# Altium PCB PCB1.PcbDoc
Units mm, origin at the board's own origin, x right, y up, seen from the top; angles counter-clockwise.
Board outline 38 x 38.6 mm, 4 copper layers (Top Layer, Internal Plane 1, Internal Plane 2, Bottom Layer); 24 components, 31 nets, 133 pads, 22 vias.
Unrouted connection lines stored in the file: 1.
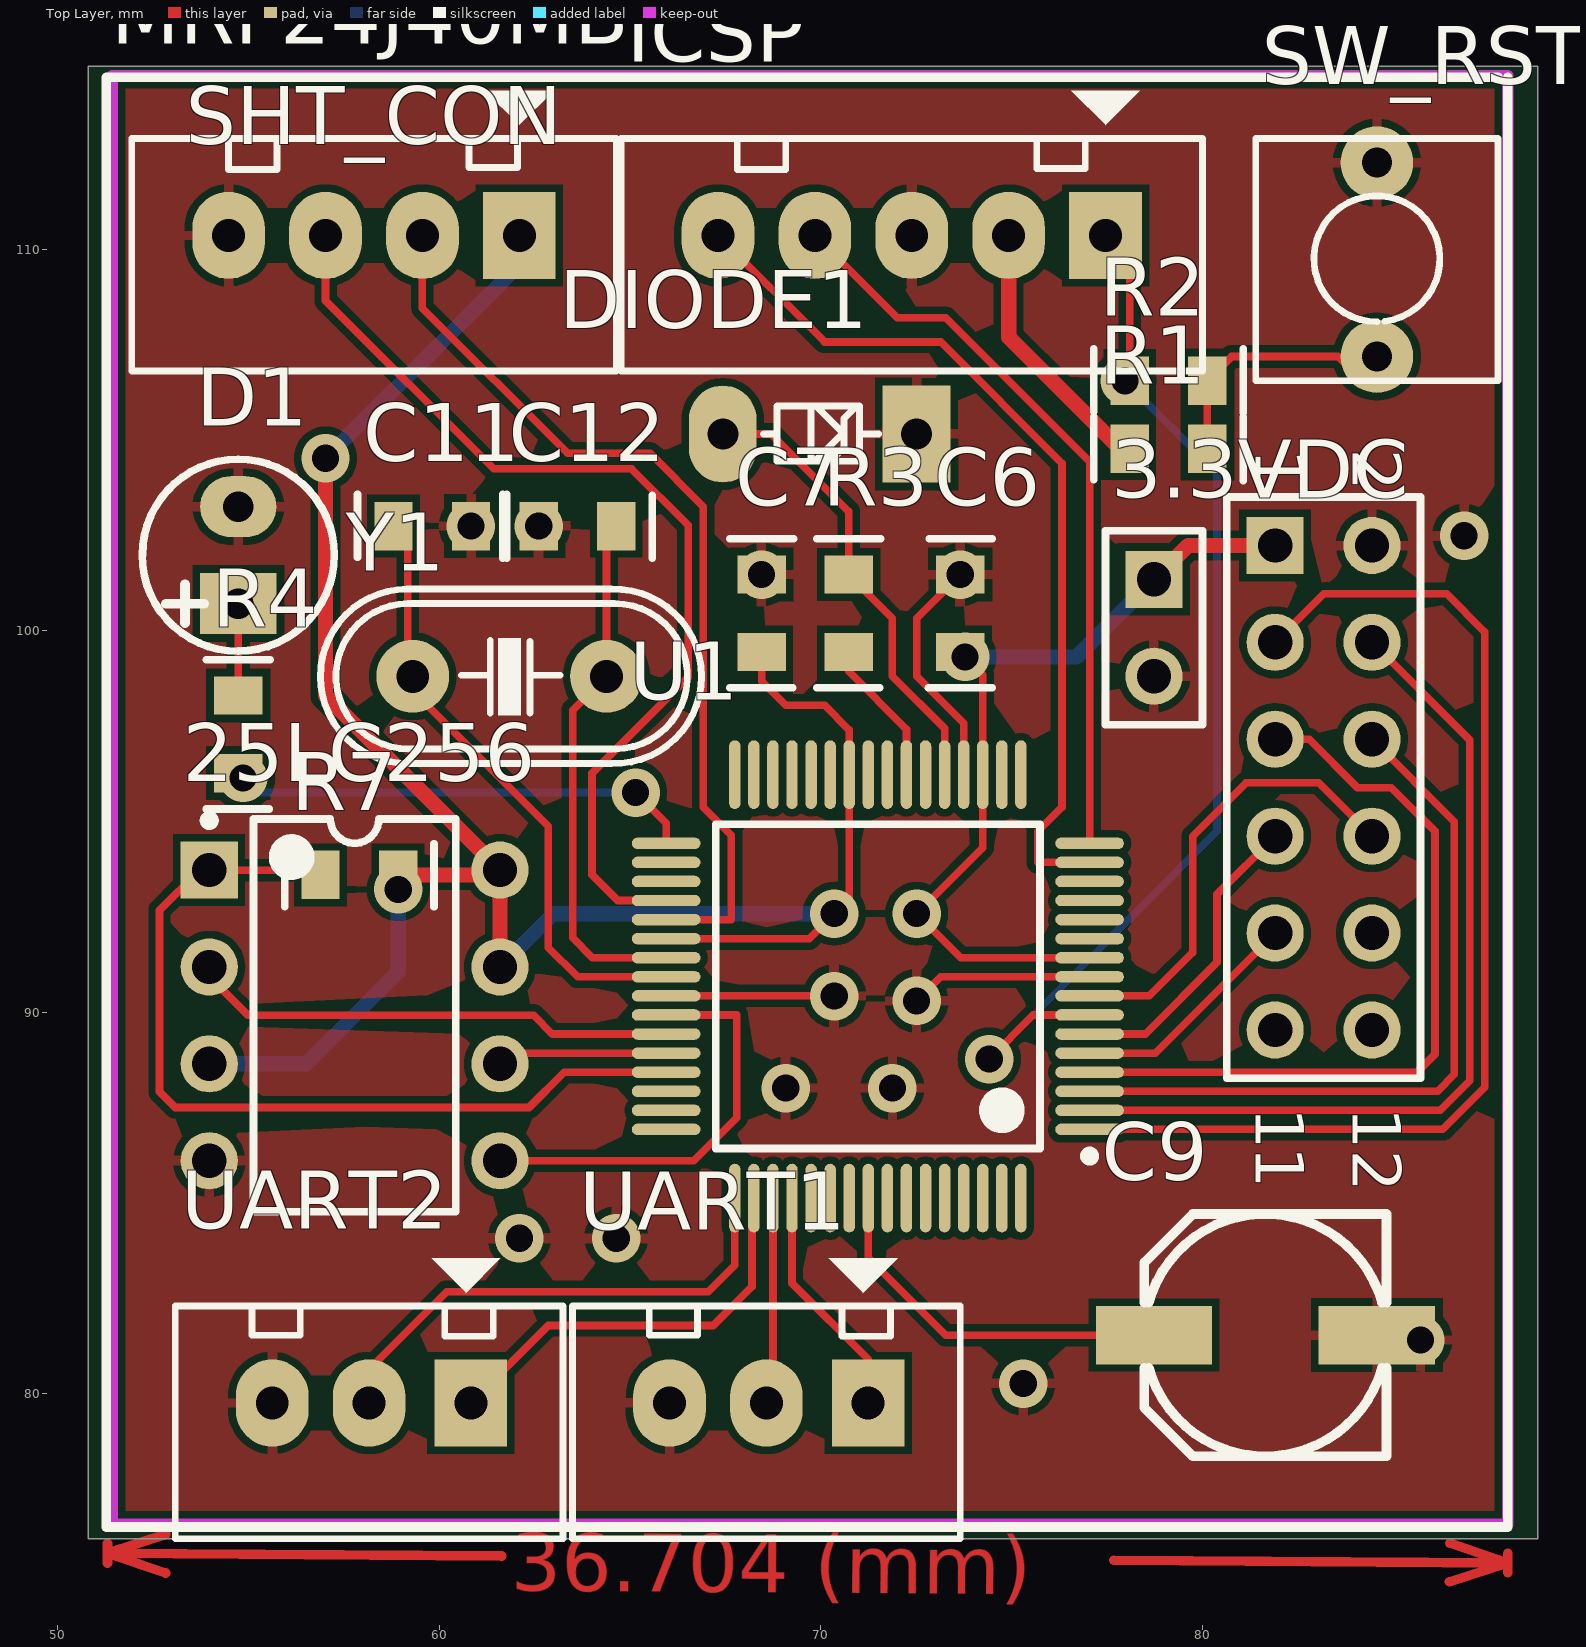
[diagram p0: Top Layer view]
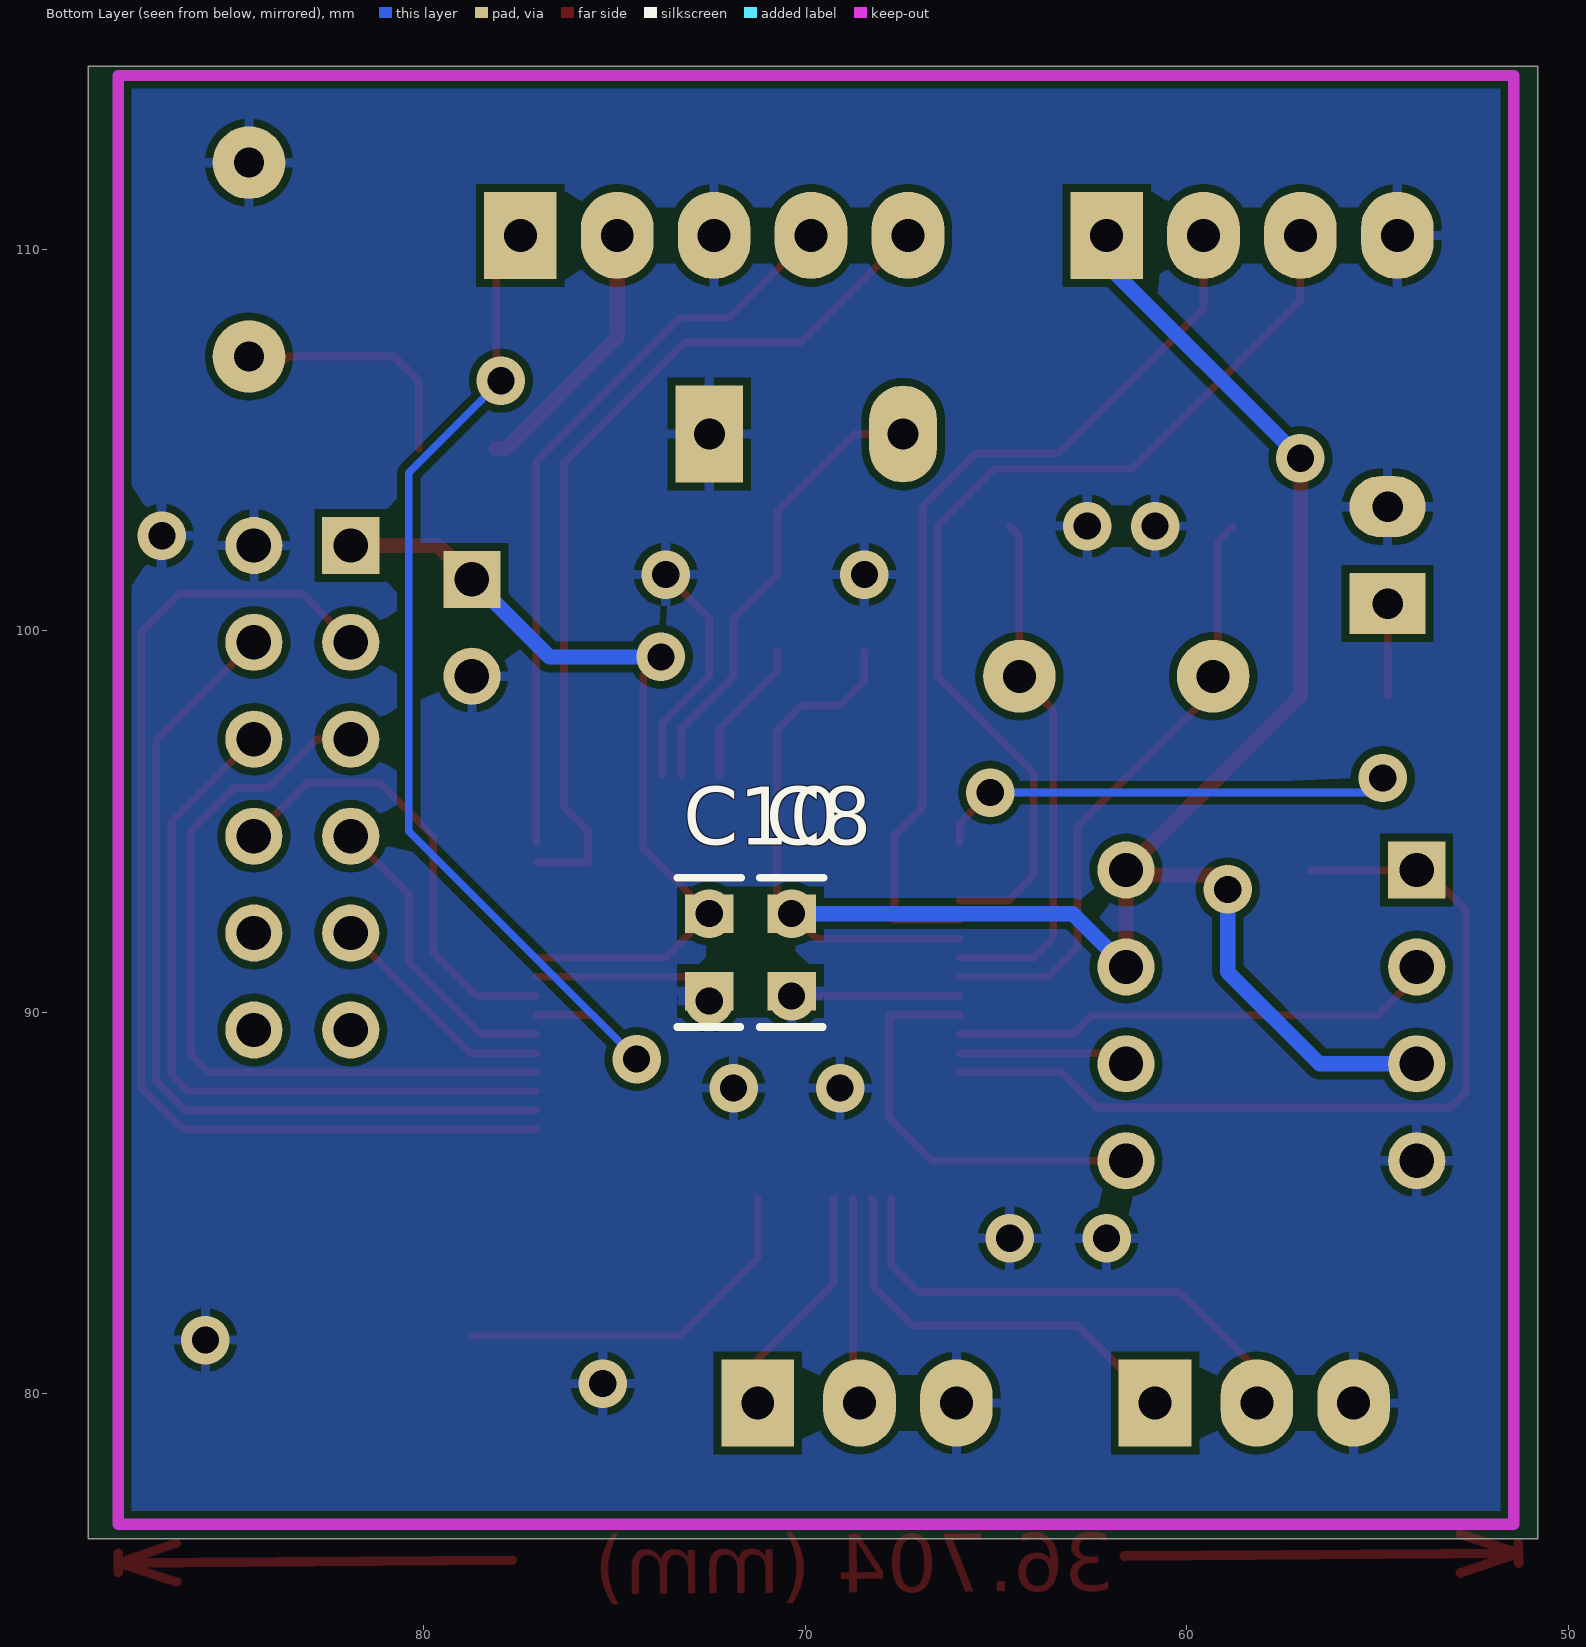
[diagram p1: Bottom Layer view, seen from below]
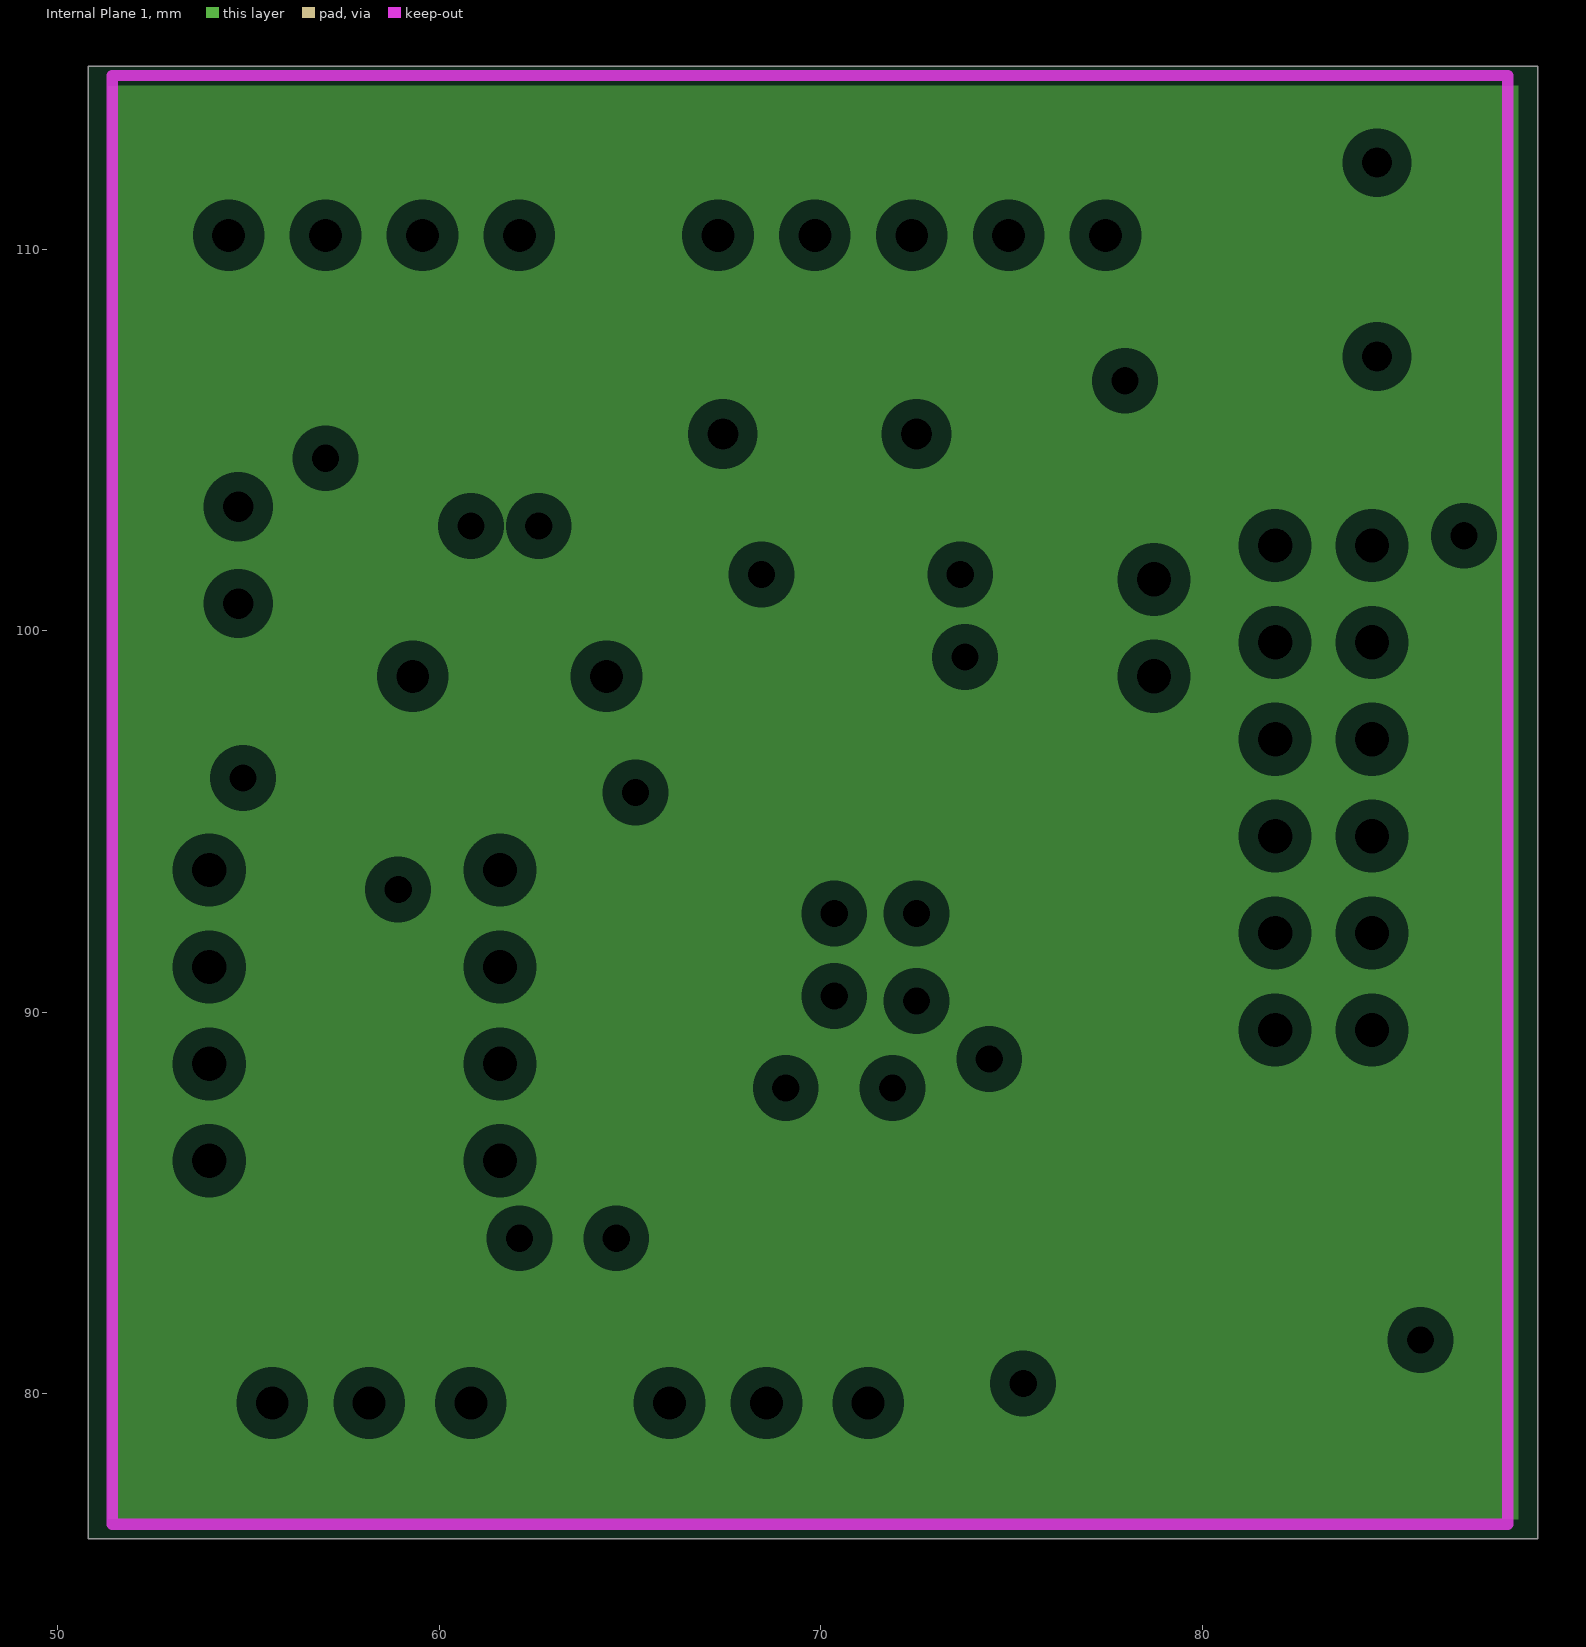
[diagram p2: Internal Plane 1, clearances drawn from the general rule]
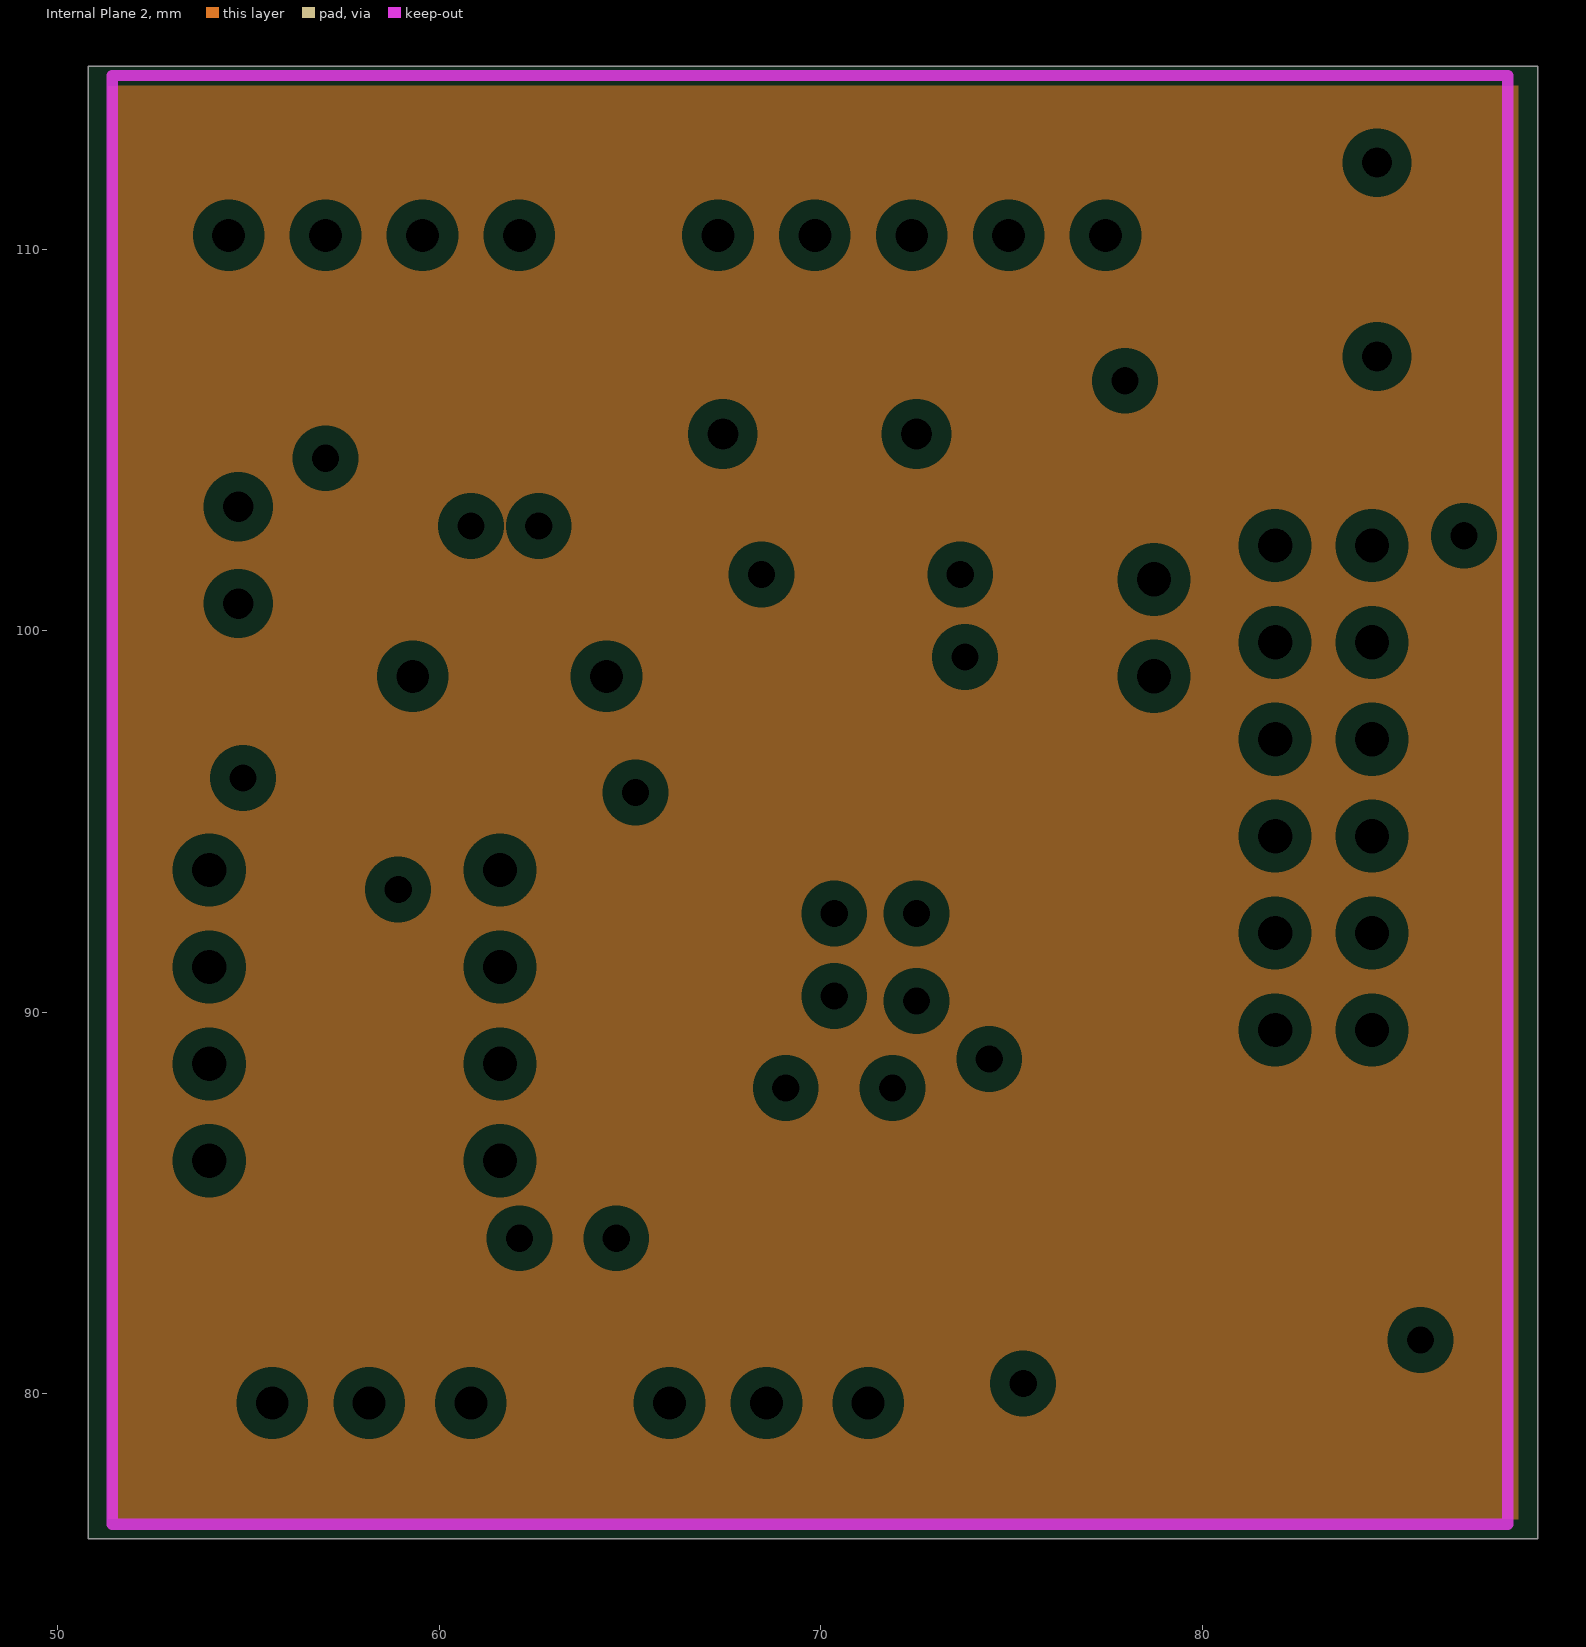
[diagram p3: Internal Plane 2, clearances drawn from the general rule]
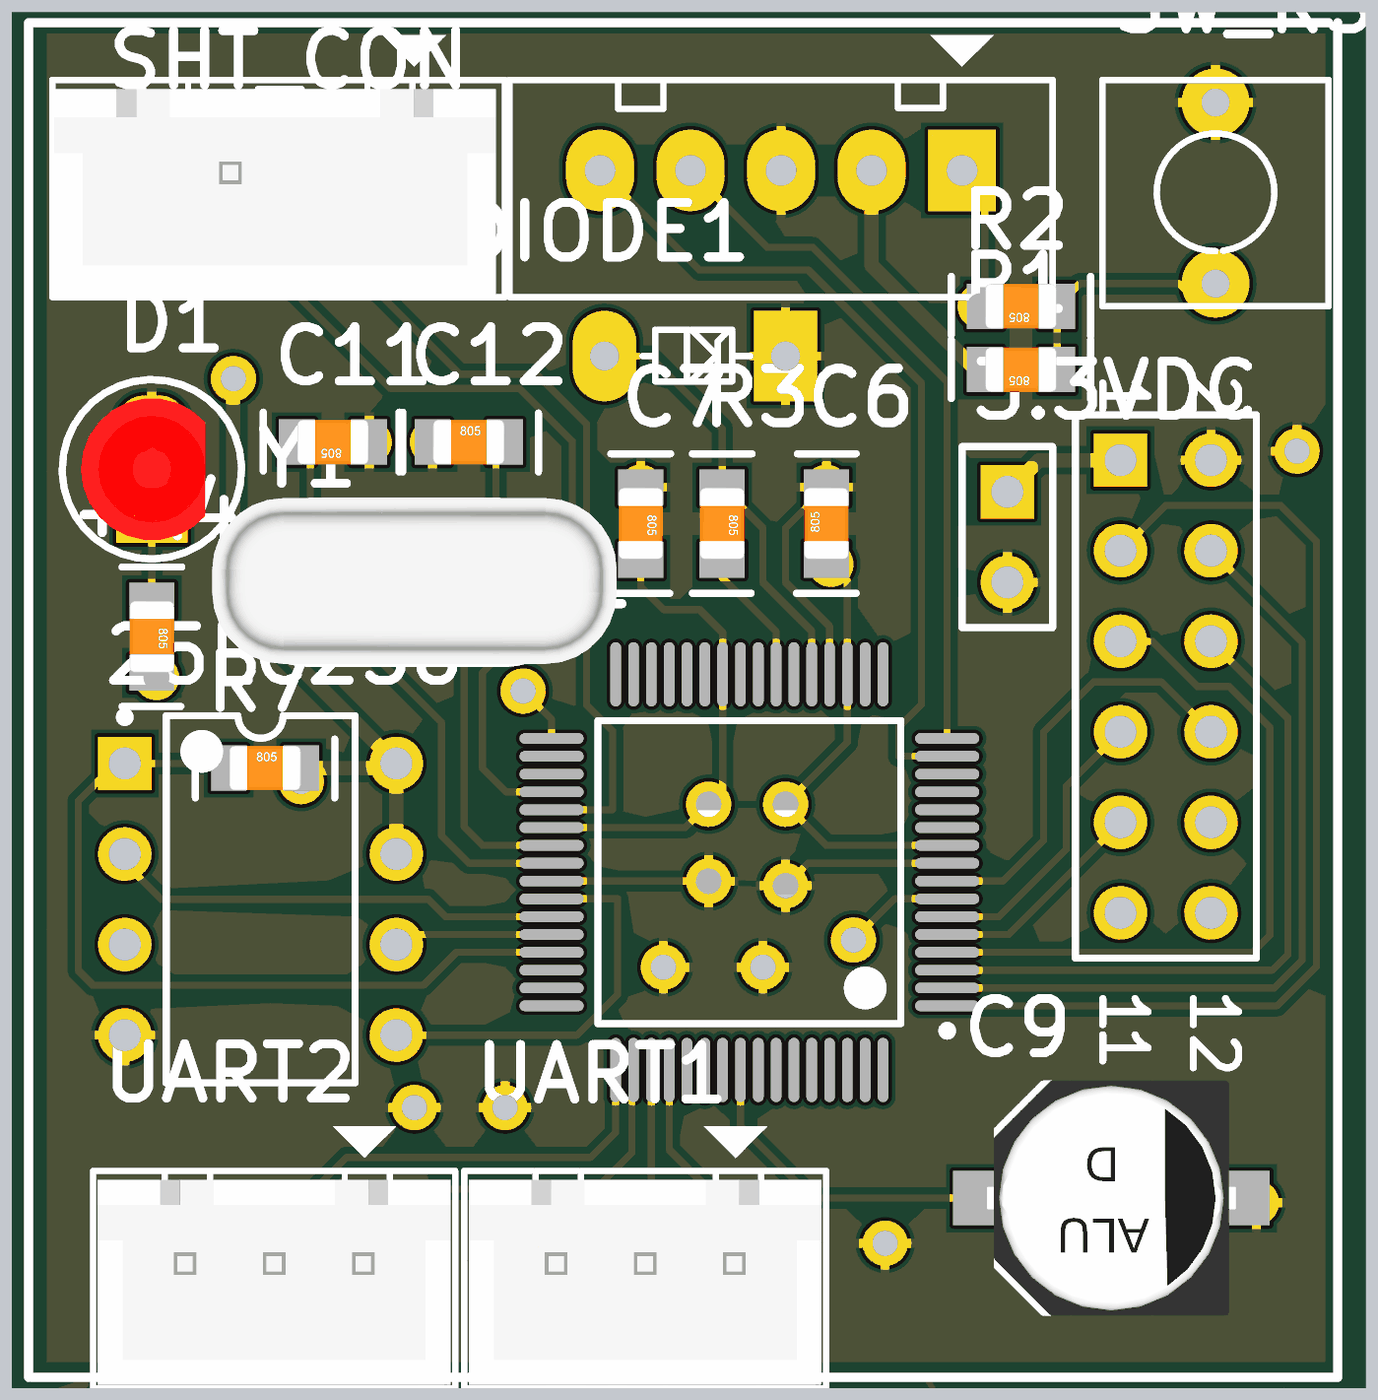
[diagram p4: 3D render of the assembled board from above, using the file's embedded part models]

## Layer stack, top to bottom
Top Solder: solder mask 0.0102, Solder Resist, Dk 3.5
Top Layer: signal copper 0.0356
Dielectric1: dielectric 0.32, FR-4, Dk 4.8
Internal Plane 1: plane copper 0.0356
Dielectric2: dielectric 0.32, FR-4, Dk 4.8
Internal Plane 2: plane copper 0.0356
Dielectric3: dielectric 0.32, FR-4, Dk 4.8
Bottom Layer: signal copper 0.0356
Bottom Solder: solder mask 0.0102, Solder Resist, Dk 3.5

## Board outline
50.8,76.2 88.8,76.2 88.8,114.8 50.8,114.8

## Design rules (kind name [scope] priority, off if disabled: settings)
Clearance [All] p1: gap=0.2
PlaneClearance [All] p1: clearance=0.508
PlaneConnect [All] p1: planeconnectstyle=Relief reliefexpansion=0.508 reliefentries=4 reliefconductorwidth=0.254 reliefairgap=0.254
PolygonConnect [All] p1: connectstyle=Relief reliefconductorwidth=0.254 reliefentries=4 polygonreliefangle="90 Angle" airgapwidth=0.254
RoutingVias [All] p1: holewidth=0.6 width=1 viastyle="Through Hole" minholewidth=0.711 minwidth=1.27 maxholewidth=0.711 maxwidth=1.27
SilkToSolderMaskClearance SilkscreenOverComponentPads [IsPad] p1: minsilkscreentomaskgap=0.254 clearancetoexposedcopper=TRUE
SolderMaskExpansion [All] p1: expansion=0.102
UnpouredPolygon [All] p1: allowunpoured=FALSE
Width [All] p1: maxlimit=0.2 minlimit=0.2 preferedwidth=0.2
26 further rules are at their usual default settings.

## Components (designator, comment, footprint, x,y, rotation, side; value= is the part's Value field where it differs from the comment)
3.3VDC "OUT 3.3V" HDR1X2 78.74,101.346 r270 top
25LC256 "25LC256" DIP-8 57.785,89.916 r0 top
C6 "Cap" C0805 73.66,100.457 r90 top
C7 "Cap" C0805 68.453,100.457 r270 top
C8 "Cap" C0805 70.358,91.567 r270 bottom
C9 "Cap2" "CAP P 6.3x5.4" 81.661,81.534 r180 top
C10 "Cap" C0805 72.517,91.567 r270 bottom
C11 "Cap" C0805 59.817,102.743 r180 top
C12 "Cap" C0805 63.627,102.743 r0 top
D1 "LED nguon" LED3mm 54.737,101.981 r90 top
DIODE1 "Diode" DZ0.5A 67.437,105.156 r180 top
ICSP "ICSP" CON5 77.47,110.363 r180 top
MRF24J40MB "Header 6X2" MRF24J40MB_board_mini 85.725,103.505 r180 top locked
R1 "Res1" C0805 79.121,104.775 r180 top
R2 "res" C0805 79.121,106.553 r180 top
R3 "Res1" C0805 70.739,100.457 r270 top
R4 "Res1" C0805 54.737,97.282 r270 top
R7 "Res Semi" C0805 57.912,93.599 r0 top
SHT_CON "SHT10 conector" CON4 62.103,110.363 r180 top
SW_RST "SW" SW2 84.582,112.268 r270 top
U1 "PIC24FJ128GA306" TQFP-PT64_N 71.501,90.678 r180 top
UART1 "UART1" CON3 71.12,79.756 r180 top
UART2 "UART2" CON3 60.706,79.756 r180 top
Y1 "XTAL" XT2 61.849,98.806 r180 top

## Footprints (in the part's own frame and the unit in brackets; to place one, negate y for a bottom-side part, rotate by r counter-clockwise, add the part's x,y. Pads: shape width x height; smd on the part's side, far side on the other; paste and mask are expansions set on the pad)
C0805 [mm] "Chip Resistor; Body 2.0 x 1.3 mm (LxW typ)"
  rect 1x1.27 smd: 1(-1.016,0) 2(1.016,0)
  silkscreen extent -1.96,-0.84 1.96,0.84, body extent -1,-0.62 1,0.63, height 0.78
"CAP P 6.3x5.4" [mil]
  rect 120x60 smd: 1(115,0) 2(-115,0)
  silkscreen extent -125,-125 125,125, body extent -138,-130 138,130, height 213
CON3 [mil] "CON 3"
  rect 75x90 hole 34: 1(-5,0)
  oval 75x90 hole 34: 2(100,0) 3(200,0)
  silkscreen extent -100,-150 300,140, body extent -95,-90 295,136, height 276
CON4 [mil] "CON4"
  rect 75x90 hole 34: 1(0,0)
  oval 75x90 hole 34: 2(100,0) 3(200,0) 4(300,0)
  silkscreen extent -100,-150 400,140, body extent -90,-90 398,136, height 276
CON5 [mil] "CON5"
  rect 75x90 hole 34: 1(0,0)
  oval 75x90 hole 34: 2(100,0) 3(200,0) 4(300,0) 5(400,0)
  silkscreen extent -100,-150 500,140
DIP-8 [mm] "DIP; 8 Leads; Row Spacing 7.62 mm; Pitch 2.54 mm"
  rect 1.5x1.5 hole 0.9: 1(-3.81,3.81)
  round 1.5 hole 0.9: 2(-3.81,1.27) 3(-3.81,-1.27) 4(-3.81,-3.81) 5(3.81,-3.81) 6(3.81,-1.27) 7(3.81,1.27) 8(3.81,3.81)
  silkscreen extent -3.93,-5.15 2.65,5.23, body extent -3.6,-5.15 3.6,5.15, height 5.08
DZ0.5A [mil] "Diode Zenner, W 80mil, L 300mil"
  oval 70x100 hole 32: 1(0,0)
  rect 70x100 hole 32: 2(-200,0)
  silkscreen extent -161,-29 -42,28
HDR1X2 [mm] "Connector; Header; 2 Position"
  rect 1.5x1.5 hole 0.9: 1(0,0)
  round 1.5 hole 0.9: 2(2.54,0)
  silkscreen extent -1.27,-1.27 3.81,1.27
LED3mm [mm]
  rect 1.6x2 hole 0.8: 1(-1.27,0)
  oval 1.6x2 hole 0.8: 2(1.27,0)
  silkscreen extent -2.52,-2.51 2.51,2.52, body extent -1.99,-1.5 1.99,1.99, height 5.38
MRF24J40MB_board_mini [mm]
  rect 1.5x1.5 hole 0.9: 1(3.81,1.27)
  round 1.5 hole 0.9: 2(1.27,1.27) 3(3.81,3.81) 4(1.27,3.81) 5(3.81,6.35) 6(1.27,6.35) 7(3.81,8.89) 8(1.27,8.89) 9(3.81,11.43) 10(1.27,11.43) 11(3.81,13.97) 12(1.27,13.97)
  silkscreen extent -2.29,-11 34.45,27, body extent 0,0 5.08,15.24, height 7
SW2 [mil] "SW button 2pin, 250x 250 mil"
  round 75 hole 31: 1(0,0) 2(200,0)
  silkscreen extent -25,-125 225,125
TQFP-PT64_N [mm] "Thin QFP, 64-Leads, Body 10x10mm, Pitch 0.5mm, IPC Medium Density"
  oval 1.8x0.3 smd: 1(-5.55,3.75) 2(-5.55,3.25) 3(-5.55,2.75) 4(-5.55,2.25) 5(-5.55,1.75) 6(-5.55,1.25) 7(-5.55,0.75) 8(-5.55,0.25) 9(-5.55,-0.25) 10(-5.55,-0.75) 11(-5.55,-1.25) 12(-5.55,-1.75) 13(-5.55,-2.25) 14(-5.55,-2.75) 15(-5.55,-3.25) 16(-5.55,-3.75) 33(5.55,-3.75) 34(5.55,-3.25) 35(5.55,-2.75) 36(5.55,-2.25) 37(5.55,-1.75) 38(5.55,-1.25) 39(5.55,-0.75) 40(5.55,-0.25) 41(5.55,0.25) 42(5.55,0.75) 43(5.55,1.25) 44(5.55,1.75) 45(5.55,2.25) 46(5.55,2.75) 47(5.55,3.25) 48(5.55,3.75)
  oval 0.3x1.8 smd: 17(-3.75,-5.55) 18(-3.25,-5.55) 19(-2.75,-5.55) 20(-2.25,-5.55) 21(-1.75,-5.55) 22(-1.25,-5.55) 23(-0.75,-5.55) 24(-0.25,-5.55) 25(0.25,-5.55) 26(0.75,-5.55) 27(1.25,-5.55) 28(1.75,-5.55) 29(2.25,-5.55) 30(2.75,-5.55) 31(3.25,-5.55) 32(3.75,-5.55) 49(3.75,5.55) 50(3.25,5.55) 51(2.75,5.55) 52(2.25,5.55) 53(1.75,5.55) 54(1.25,5.55) 55(0.75,5.55) 56(0.25,5.55) 57(-0.25,5.55) 58(-0.75,5.55) 59(-1.25,5.55) 60(-1.75,5.55) 61(-2.25,5.55) 62(-2.75,5.55) 63(-3.25,5.55) 64(-3.75,5.55)
  silkscreen extent -5.68,-4.25 4.25,4.57, body extent -5,-5 5,5, height 1.2
XT2 [mil] "Footpin for Crystal 2 pin"
  round 75 hole 34: 1(-100,0) 2(100,0)
  silkscreen extent -198,-90 195,90, body extent -233,-93 213,90, height 138

## Part data
3.3VDC: library part "Header 2", "Header, 2-Pin"
C6 C7 C8 C9 C10 C11 C12: "Capacitor"
D1: library part LED0, "Typical INFRARED GaAs LED"
DIODE1: "Default Diode"
ICSP: library part "Header 5", "Header, 5-Pin"
MRF24J40MB: "Header, 6-Pin, Dual row"
R1 R3 R4: "Resistor"
R2: library part Res1, "Resistor"
R7: "Semiconductor Resistor"
SHT_CON: library part "Header 4", "Header, 4-Pin"
SW_RST: library part SW2, "Switch button 2 pin"
UART1 UART2: library part Con3, "Connector 3"
Y1: "Crystal Oscillator"

## Via types
v1: diameter 1.27, hole 0.711, Top Layer to Bottom Layer, 22 vias

## Nets (pads, with @x,y where several pads share a name; then routed paths per layer and width w, separated by ;. In a path a pad name is that pad's centre, name@x,y a point inside that pad or via, vN(x,y) a via of type N, cw(c..) or ccw(c..) an arc to the next point about the centre after c; other vN are vias at no path point)
3.3VDC: 3.3VDC.1 25LC256.3 25LC256.7 25LC256.8 C6.1 C7.2 C8.1 C10.1 MRF24J40MB.1 R7.2 SHT_CON.1 U1.10 U1.19 U1.26 U1.38 | length 78.6
  Top Layer w0.2: U1.38 69.703,91.928 v1(70.358,92.583) 70.751,92.976 U1.26 70.751,97.397 70.104,98.044 69.088,98.044 68.453,98.679 C7.2 ; C6.1 v1(73.787,99.314) 74.251,98.85 U1.19 74.251,94.317 v1(72.517,92.583) 73.672,91.428 U1.10
  Top Layer w0.4: v1(57.023,104.521) 57.023,98.298 25LC256.8 25LC256.7 ; R7.2 25LC256.8@61.468,93.599 ; 3.3VDC.1 79.629,102.235 MRF24J40MB.1
  Bottom Layer w0.2: SHT_CON.1@62.103,109.601 SHT_CON.1
  Bottom Layer w0.4: 25LC256.3 56.515,88.646 58.928,91.059 v1(58.928,93.218) ; v1(57.023,104.521) SHT_CON.1@62.103,109.601 ; 25LC256.7 62.992,92.583 v1(70.358,92.583) ; v1(73.787,99.314) 76.708,99.314 3.3VDC.1
AN8: DIODE1.1 R3.1 U1.21 | length 12.1
  Top Layer w0.2: DIODE1.1 68.707,105.156 70.739,103.124 R3.1 71.882,100.33 71.882,98.806 73.251,97.437 U1.21
CS1: MRF24J40MB.6 U1.3 | length 19.4
  Top Layer w0.2: U1.3 86.172,87.928 86.614,88.37 86.614,94.996 MRF24J40MB.6
CS2: 25LC256.1 R7.1 U1.45 | length 22.9
  Top Layer w0.2: 25LC256.1@53.721,93.726 52.671,92.676 52.671,87.918 53.086,87.503 62.357,87.503 63.282,88.428 U1.45 ; 25LC256.1 R7.1@56.769,93.726
GND: 3.3VDC.2 25LC256.4 C6.2 C7.1 C8.2 C9.2 C10.2 C11.1 C12.1 D1.2 DIODE1.2 ICSP.3 MRF24J40MB.2 SHT_CON.4 SW_RST.1 U1.9 U1.20 U1.25 U1.41 UART1.3 UART2.3 | length 15.7
  Top Layer w0.2: U1.41 70.354,90.428 v1(70.358,90.424) ; v1(72.517,90.297) 73.148,90.928 U1.9 ; v1(73.66,101.473) 72.517,100.33 72.517,98.806 73.751,97.572 U1.20
  Bottom Layer w0.2: v1(72.517,90.297) C10.2
  other v1: 75.311,80.264 85.725,81.407 62.103,84.074 64.643,84.074 69.088,88.011 71.882,88.011 68.453,101.473 86.868,102.489 60.833,102.743 62.611,102.743
INT1_RP21: MRF24J40MB.5 U1.4 | length 20.3
  Top Layer w0.2: U1.4 85.634,88.428 86.106,88.9 86.106,94.742 84.963,95.885 84.074,95.885 82.804,97.155 MRF24J40MB.5
LED1: R4.2 U1.33 | length 12.3
  Top Layer w0.2: R4.2 v1(54.864,96.139) ; v1(65.151,95.758) 65.951,94.958 U1.33
  Bottom Layer w0.2: v1(54.864,96.139) 55.245,95.758 v1(65.151,95.758)
NetC9_1: C9.1 U1.56 | length 9.9
  Top Layer w0.2: U1.56 71.251,83.562 73.279,81.534 C9.1
NetD1_1: D1.1 R4.1 | length 2.4
  Top Layer w0.2: R4.1 D1.1
NetR1_1: R1.1 R2.1 SW_RST.2 | length 6.2
  Top Layer w0.2: R1.1 R2.1 80.772,107.188 83.566,107.188 SW_RST.2@84.074,106.68
OSCI: C12.2 U1.39 Y1.1 | length 13.9
  Top Layer w0.2: C12.2 64.389,102.489 Y1.1 63.5,97.917 63.5,91.948 64.02,91.428 U1.39
OSCO: C11.2 U1.40 Y1.2 | length 16.1
  Top Layer w0.2: C11.2 59.182,102.362 59.182,98.933 Y1.2 59.309,98.425 62.865,94.869 62.865,91.694 63.631,90.928 U1.40
PGC: ICSP.5 U1.15 | length 23.6
  Top Layer w0.2: ICSP.5 70.104,107.569 73.152,107.569 76.327,104.394 76.327,95.377 75.692,94.742 75.692,93.928 U1.15
PGD: ICSP.4 U1.16 | length 19.7
  Top Layer w0.2: ICSP.4 72.009,108.204 73.279,108.204 77.051,104.432 U1.16
RB10: R3.2 U1.23 | length 3.8
  Top Layer w0.2: R3.2 70.739,98.933 72.251,97.421 U1.23
RSTMRF: MRF24J40MB.3 U1.1 | length 29.2
  Top Layer w0.2: U1.1 86.303,86.928 87.414,88.039 87.414,99.966 86.415,100.965 83.185,100.965 MRF24J40MB.3
SCK1_RP26: MRF24J40MB.9 U1.5 | length 6.2
  Top Layer w0.2: U1.5 78.768,88.928 MRF24J40MB.9
SCK2_RP3: 25LC256.6 U1.44 | length 4.7
  Top Layer w0.2: 25LC256.6@61.341,88.646 61.623,88.928 U1.44
SCL1: SHT_CON.2 U1.37 | length 24.3
  Top Layer w0.2: SHT_CON.2 59.563,108.458 63.373,104.648 65.532,104.648 66.929,103.251 66.929,95.377 67.663,94.643 67.663,92.428 U1.37
SDA1: SHT_CON.3 U1.36 | length 26.1
  Top Layer w0.2: SHT_CON.3 57.023,108.654 61.429,104.248 65.043,104.248 66.529,102.762 66.529,98.787 64.008,96.266 64.008,93.599 64.679,92.928 U1.36
SDI1_RP27: MRF24J40MB.8 U1.8 | length 12.1
  Top Layer w0.2: U1.8 78.617,90.428 79.756,91.567 79.756,94.615 81.153,96.012 83.058,96.012 MRF24J40MB.8
SDI2_RP4: 25LC256.2 U1.43 | length 13
  Top Layer w0.2: 25LC256.2@53.721,91.186 54.991,89.916 62.484,89.916 62.972,89.428 U1.43
SDO1_RP19: MRF24J40MB.7 U1.6 | length 8.1
  Top Layer w0.2: U1.6 78.506,89.428 80.391,91.313 80.391,93.091 MRF24J40MB.7
SDO2_RP2: 25LC256.5 U1.42 | length 11.5
  Top Layer w0.2: 25LC256.5@61.341,86.106 66.675,86.106 67.806,87.237 67.806,89.928 U1.42
U1RX_RP22: U1.51 UART1.2 | length 5.4
  Top Layer w0.2: UART1.2 68.751,79.927 U1.51
U1TX_RP25: U1.52 UART1.1 | length 6.2
  Top Layer w0.2: U1.52 69.251,82.895 71.247,80.899 UART1.1
U2RX_RP24: U1.49 UART2.2 | length 13.4
  Top Layer w0.2: UART2.2 58.166,80.645 60.198,82.677 67.056,82.677 67.751,83.372 U1.49
U2TX_RP23: U1.50 UART2.1 | length 11
  Top Layer w0.2: UART2.1 62.865,81.788 67.183,81.788 68.201,82.806 68.201,85.078 U1.50
VCC: ICSP.2 R1.2 | length 7.1
  Top Layer w0.4: ICSP.2 74.93,107.696 77.851,104.775 R1.2
VPP: ICSP.1 R2.2 U1.7 | length 28.4
  Top Layer w0.2: v1(74.422,88.773) 75.577,89.928 U1.7 ; ICSP.1 78.105,109.728 R2.2
  Bottom Layer w0.2: v1(74.422,88.773) 80.391,94.742 80.391,104.14 v1(77.978,106.553)
WAKE: MRF24J40MB.4 U1.2 | length 22.8
  Top Layer w0.2: U1.2 86.237,87.428 87.014,88.205 87.014,97.136 MRF24J40MB.4
pads on no net: MRF24J40MB.10 MRF24J40MB.11 MRF24J40MB.12 U1.11 U1.12 U1.13 U1.14 U1.17 U1.18 U1.22 U1.24 U1.27 U1.28 U1.29 U1.30 U1.31 U1.32 U1.34 U1.35 U1.46 U1.47 U1.48 U1.53 U1.54 U1.55 U1.57 U1.58 U1.59 U1.60 U1.61 U1.62 U1.63 U1.64
copper on no net: | length 28.1
  Top Layer w0.254: 51.306,75.565 51.31,76.073 ; 52.828,75.3 51.308,75.819 ; 52.835,76.316 51.308,75.819 ; 61.636,75.748 51.308,75.819 ; 77.683,75.636 88.011,75.565 ; 86.484,75.068 88.011,75.565 ; 86.491,76.084 88.011,75.565 ; 88.009,75.311 88.013,75.819

## Polygon pours and split planes (outlines as drawn)
GND on Bottom Layer "Top Layer-No Net" (solid, pour order 19): 51.435,114.3 51.689,114.554 88.011,114.554 88.011,76.581 87.757,76.835 51.435,76.835
GND on Top Layer "Top Layer-No Net" (solid, pour order 17): 51.435,114.554 87.884,114.554 88.011,114.427 88.011,76.581 51.435,76.581
no net on Internal Plane 1 (split plane): 88.29,76.71 51.31,76.71 51.31,114.29 88.29,114.29
no net on Internal Plane 2 (split plane): 88.29,76.71 51.31,76.71 51.31,114.29 88.29,114.29

## Keep-outs
Keep-Out Layer:
  lines w0.3: 51.435,76.581 88.011,76.581 88.011,114.554 51.435,114.554 51.435,76.581

## Other copper
Top Layer:
  text "36.704 (mm)" at 61.883,74.832 h1.52 r359.6

## Silkscreen, mask and mechanical layers (free items; w line width, h text height)
Drill Drawing:
  text ".LEGEND" at 93.88,81.28 h1.52
  text "Drill Drawing." at 93.88,78.74 h1.52

## Dimensions
51.435,76.581 to 88.011,76.581 on Mechanical 1
51.435,76.581 to 51.435,114.554 on Mechanical 1

## Text inside footprints (layer, text, board x,y; h text height)
MRF24J40MB: Top Overlay "2" at 83.947,104.775 h1.27 r270; Top Overlay "1" at 81.407,104.775 h1.27 r270; Top Overlay "1" at 81.407,87.503 h1.27 r270; Top Overlay "1" at 81.407,86.487 h1.27 r270; Top Overlay "12" at 83.947,87.503 h1.27 r270